# Altium PCB UC3843_SWITCHING_POWER_SUPPLY_V1.PcbDoc
Units mil, origin at the board's own origin, x right, y up, seen from the top; angles counter-clockwise.
Board outline 3300 x 1700 mil, 2 copper layers (Top Layer, Bottom Layer); 34 components, 24 nets, 89 pads, 0 vias.
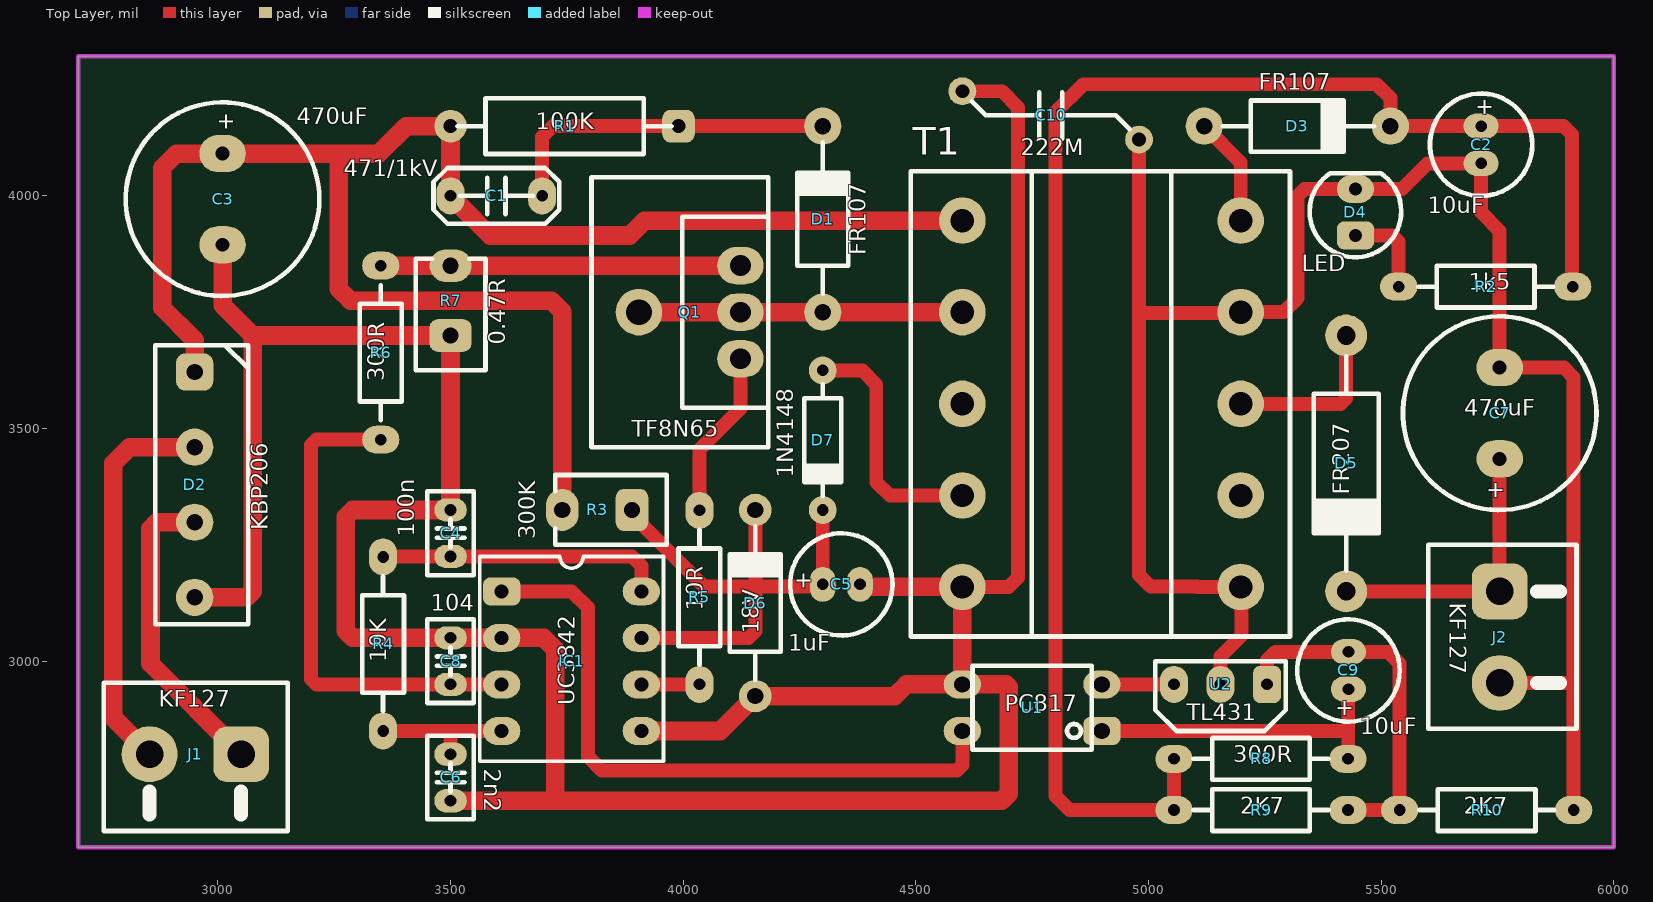
[diagram p0: Top Layer view]
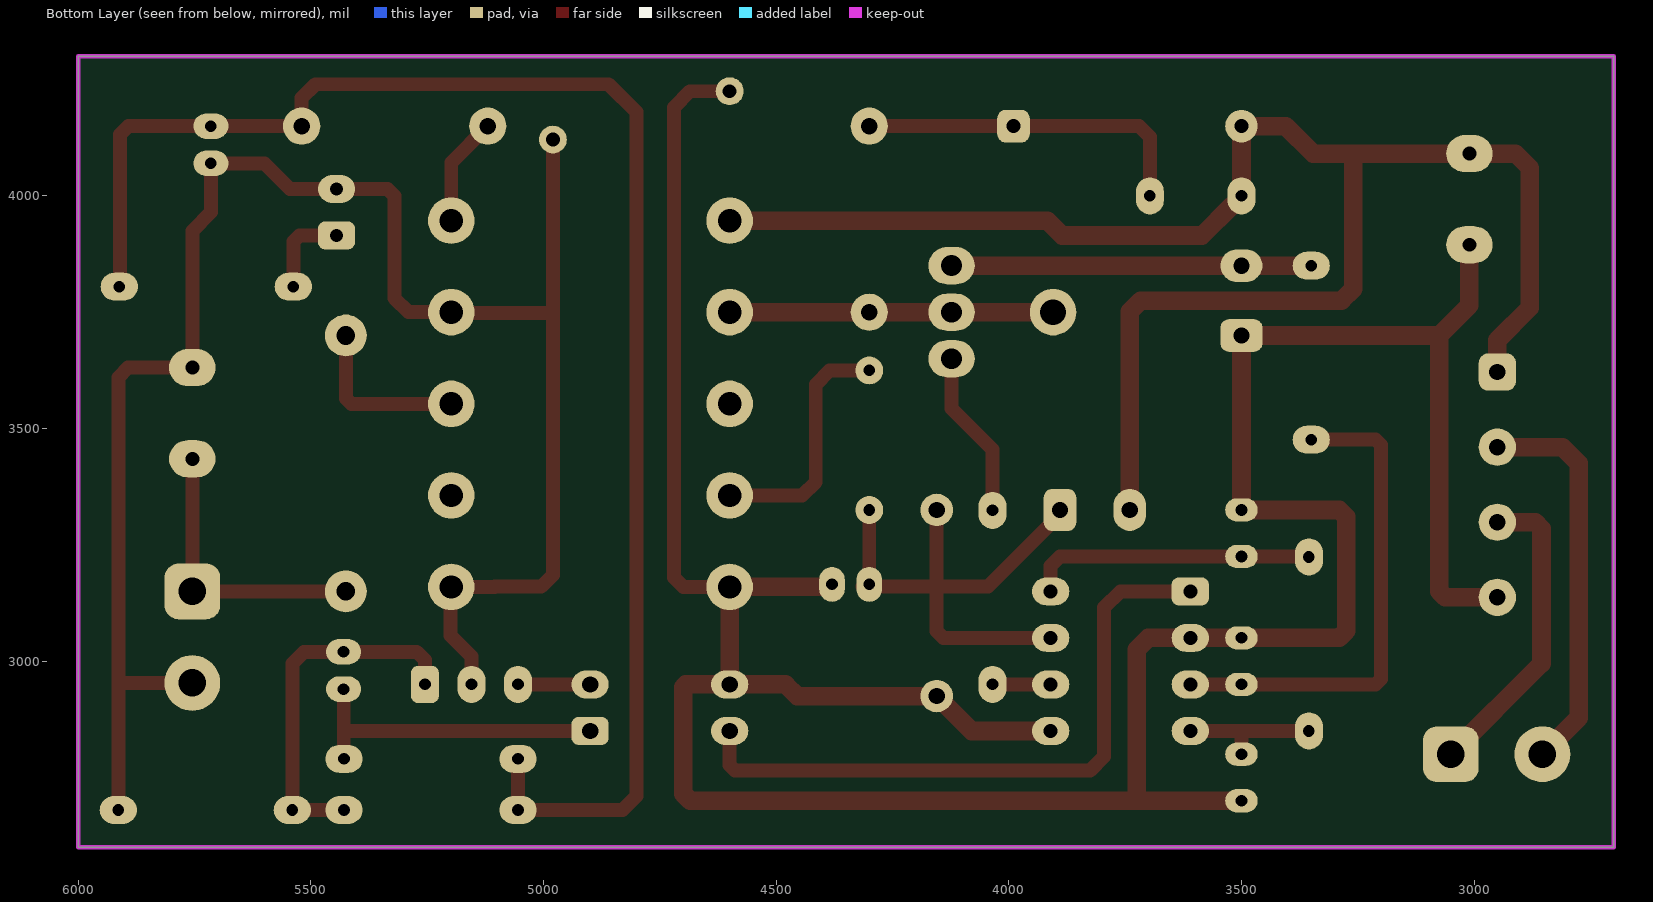
[diagram p1: Bottom Layer view, seen from below]
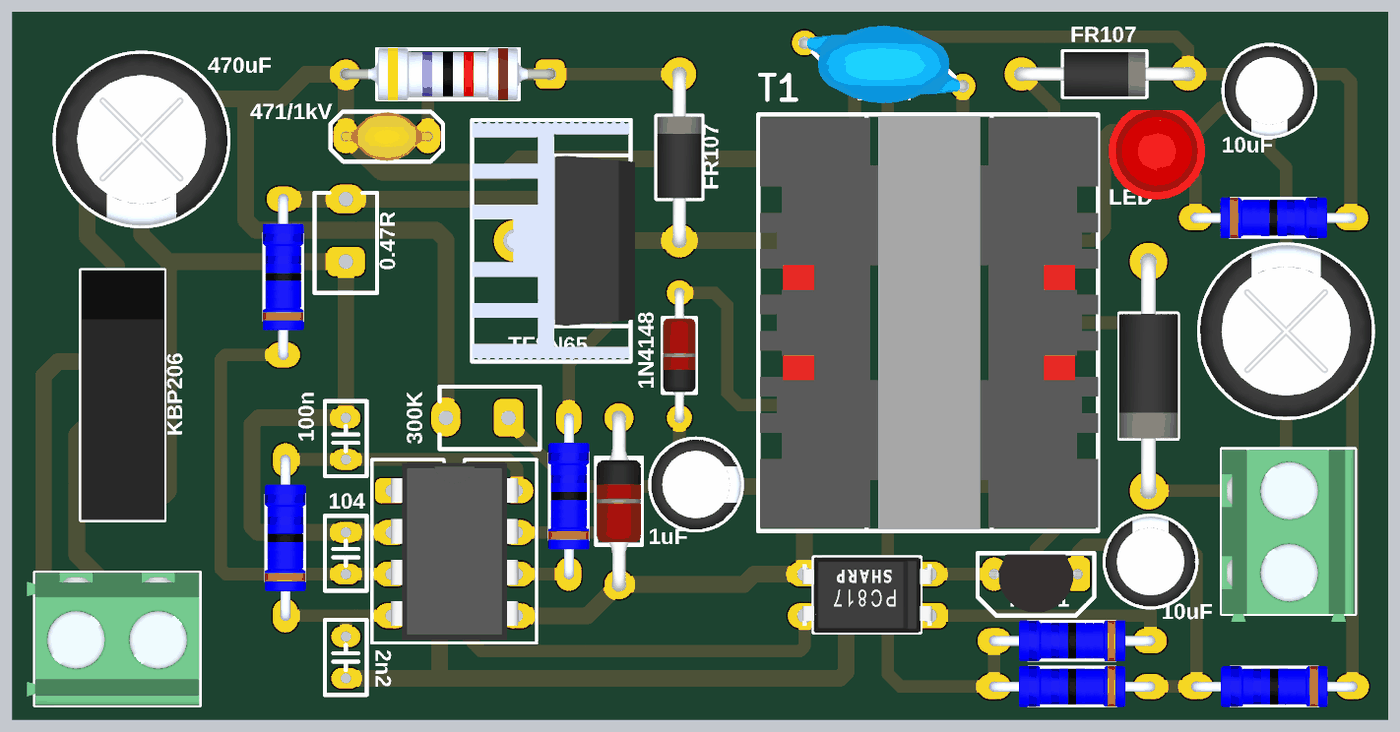
[diagram p2: 3D render of the assembled board from above, using the file's embedded part models]

## Layer stack, top to bottom
Top Solder: solder mask 0.4, Solder Resist, Dk 3.5
Top Layer: signal copper 1.4
Dielectric 1: dielectric 12.6, FR-4, Dk 4.8
Bottom Layer: signal copper 1.4
Bottom Solder: solder mask 0.4, Solder Resist, Dk 3.5

## Board outline
2700,2600 6000,2600 6000,4300 2700,4300

## Design rules (kind name [scope] priority, off if disabled: settings)
Clearance [All] p1: gap=10 ignorepadtopadclearanceinfootprint=FALSE except(0: Arc-Hole Track-Hole SMDPad-Hole THPad-Hole Via-Hole Fill-Hole Poly-Hole Region-Hole Text-Hole)
PolygonConnect [All] p1: connectstyle=Relief reliefconductorwidth=10 reliefentries=4 polygonreliefangle="90 Angle" airgapwidth=10
RoutingVias [All] p1: holewidth=28 width=50 viastyle="Through Hole" minholewidth=28 minwidth=50 maxholewidth=28 maxwidth=50
SolderMaskExpansion [All] p1: expansion=4 istentingtop=FALSE
Width [All] p1: maxlimit=50 minlimit=10 preferedwidth=20
30 further rules are at their usual default settings.

## Components (designator, comment, footprint, x,y, rotation, side; value= is the part's Value field where it differs from the comment)
C1 "471/1kV" CAP_Ceramic_5MM 3598.43,4000 r180 top
C2 "10uF" CAP_RAD_D05x11 5715,4110 r270 top
C3 "470uF" CAP_RAD_D10x12.5 3010,3993 r270 top
C4 "100n" CAP_Ceramic_2.5MM 3500,3275 r90 top
C5 "1uF" CAP_RAD_D05x11 4340,3165 r0 top
C6 "2n2" CAP_Ceramic_2.5MM 3500,2750 r90 top
C7 "470uF" CAP_RAD_D10x12.5 5755,3533 r90 top
C8 "104" CAP_Ceramic_2.5MM 3500,3000 r270 top
C9 "10uF" CAP_RAD_D05x11 5430,2980 r90 top
C10 "222M" CAP_Ceramic_473M_9.65mm 4790,4173 r0 top
D1 "FR107" DO-204AL-BK 4300,3950 r90 top
D2 "KBP206" DIODE-KBP206 2950,3379.29 r270 top
D3 "FR107" DO-204AL-BK 5320,4150 r0 top
D4 "LED" LED_5MM 5445,3965 r90 top
D5 "FR207" DO-204AC-BK 5425,3425 r270 top
D6 "18V" DO-204AL-RD 4155,3125 r90 top
D7 "1N4148" DO-204AH-RD 4300,3475 r270 top
IC1 "UC3842" DIP-8 3757.64,3012.2 r0 top
J1 "KF127" DG127-5.0-02P-14-00AH 3050,2800 r180 top
J2 "KF127" DG127-5.0-02P-14-00AH 5755,3150 r270 top
Q1 "TF8N65" TO-220F-HEAT-SINK 4123,3750 r90 top
R1 "100K" RES-0.5W-H 3745,4150 r180 top
R2 "1k5" RES-0.25W-H#1 5725,3805 r0 top
R3 "300K" RES-1W-V 3890,3325 r180 top
R4 "10K" RES-0.25W-H#1 3355,3037 r90 top
R5 "10R" RES-0.25W-H#1 4035,3137 r90 top
R6 "300R" RES-0.25W-H#2 3350,3663 r90 top
R7 "0.47R" RES-1W-V 3500,3700 r90 top
R8 "300R" RES-0.25W-H#1 5242,2790 r180 top
R9 "2K7" RES-0.25W-H#1 5242,2680 r180 top
R10 "2K7" RES-0.25W-H#1 5727,2680 r180 top
T1 "EE25" TRANSFORMER-EE25-10-6-VERTICAL(5+5) 4899.21,3553.15 r0 top
U1 "PC817" PC817-DIP 4750,2900 r180 top
U2 "TL431" TO-92 5155,2950 r180 top

## Footprints (in the part's own frame and the unit in brackets; to place one, negate y for a bottom-side part, rotate by r counter-clockwise, add the part's x,y. Pads: shape width x height; smd on the part's side, far side on the other; paste and mask are expansions set on the pad)
CAP_Ceramic_2.5MM [mil]
  oval 50x70 hole 25: 1(-50,0) 2(50,0)
  silkscreen extent -90,-50 90,50, body extent -92,-49 92,49, height 289
CAP_Ceramic_5MM [mil]
  oval 60x80 hole 25: 1(-98.43,0) 2(98.43,0)
  silkscreen extent -135,-60 135,60, body extent -110,-59 110,59, height 216
CAP_Ceramic_473M_9.65mm [mil]
  round 60 hole 30: 1(-190,52) 2(190,-52)
  silkscreen extent -170,-50 170,50, body extent -202,-93 202,93, height 354
CAP_RAD_D05x11 [mil]
  oval 55x75 hole 25: 1(-40,0) 2(40,0)
  silkscreen extent -110,-110 110,110, body extent -108,-108 108,108, height 492
CAP_RAD_D10x12.5 [mil]
  oval 80x100 hole 30: 1(-98,0) 2(98,0)
  silkscreen extent -208,-208 208,208, body extent -207,-207 207,207, height 551
DG127-5.0-02P-14-00AH [mil]
  rrect50% 120x120 hole 59.06: 1(0,0)
  round 120 hole 59.06: 2(196.85,0)
  silkscreen extent -100,-154 295,165, body extent -98,-154 315,165, height 398
DIODE-KBP206 [mil]
  rrect50% 80x80 hole 35: 1(-242.13,0)
  round 80 hole 35: 2(-80.71,0) 3(80.71,0) 4(242.13,0)
  silkscreen extent -300,-85 300,115, body extent -300,-85 300,115, height 530
DIP-8 [mil]
  rrect50% 80x60 hole 30: 1(-147.64,137.8)
  oval 80x60 hole 30: 2(-147.64,37.8) 3(-147.64,-62.2) 4(-147.64,-162.2) 5(152.36,-162.2) 6(152.36,-62.2) 7(152.36,37.8) 8(152.36,137.8)
  silkscreen extent -195,-227 200,213, body extent -150,-220 156,205, height 177
DO-204AC-BK [mil]
  round 90 hole 40: 1(-275,0) 2(275,0)
  silkscreen extent -230,-70 230,70, body extent -293,-71 293,71, height 146
DO-204AH-RD [mil]
  round 60 hole 25: 1(-150,0) 2(150,0)
  silkscreen extent -120,-40 120,40, body extent -161,-39 161,39, height 82
DO-204AL-BK [mil]
  round 80 hole 35: 1(-200,0) 2(200,0)
  silkscreen extent -160,-55 165,55, body extent -216,-53 216,53, height 110
DO-204AL-RD [mil]
  round 70 hole 35: 1(-200,0) 2(200,0)
  silkscreen extent -165,-55 165,55, body extent -216,-53 216,53, height 110
LED_5MM [mil]
  rrect50% 60x80 hole 27.56: 1(-50,0)
  oval 60x80 hole 27.56: 2(50,0)
  silkscreen extent -97,-98 84,98, body extent -116,-116 98,116, height 339
PC817-DIP [mil]
  rrect50% 80x60 hole 35: 1(-150,50)
  oval 80x60 hole 35: 2(-150,-50) 3(150,-50) 4(150,50)
  silkscreen extent -128,-90 128,90, body extent -155,-90 155,90, height 169
RES-0.5W-H [mil]
  rrect50% 70x70 hole 30: 1(-245,0)
  round 70 hole 30: 2(245,0)
  silkscreen extent -230,-60 230,60, body extent -258,-63 258,63, height 143
RES-0.25W-H#1 [mil]
  oval 80x60 hole 25: 1(-187,0) 2(187,0)
  silkscreen extent -145,-45 145,45, body extent -199,-49 199,49, height 109
RES-0.25W-H#2 [mil]
  oval 60x80 hole 25: 1(-187,0) 2(187,0)
  silkscreen extent -145,-45 145,45, body extent -199,-49 199,49, height 109
RES-1W-V [mil]
  rrect50% 70x90 hole 35: 1(0,0)
  oval 70x90 hole 35: 2(150,0)
  silkscreen extent -75,-75 165,75, body extent -79,-79 163,79, height 554
TO-92 [mil]
  rrect50% 60x80 hole 25: 1(-100,0)
  oval 60x80 hole 25: 2(0,0) 3(100,0)
  silkscreen extent -140,-50 140,100, body extent -109,-48 109,93, height 298
TO-220F-HEAT-SINK [mil]
  oval 80x100 hole 45: 1(-100,0) 2(0,0) 3(100,0)
  round 100 hole 55: 2(0,218)
  silkscreen extent -290,-60 290,320, body extent -287,-71 287,320, height 790
TRANSFORMER-EE25-10-6-VERTICAL(5+5) [mm]
  round 2.54 hole 1.27: 1(-7.6,10) 2(-7.6,5) 3(-7.6,0) 4(-7.6,-5) 5(-7.6,-10) 6(7.6,-10) 7(7.6,-5) 8(7.6,0) 9(7.6,5) 10(7.6,10)
  silkscreen extent -10.41,-12.7 10.29,12.7, body extent -10.3,-12.6 10.3,12.6, height 22.1

## Part data
C1 C4 C6 C8 C10: library part Capacitors(Disc)
C2 C3 C5 C7 C9: library part Capacitor(Radian)
D1 D3: library part Diode-FR107, "1A 1000V"
D2: library part Diode-KBP206
D4: library part "LED 5MM"
D5: library part Diode-FR207
D6: library part Diode-Zener
D7: library part Diode-1N4148, "The fast switching diode"
IC1: library part SMPS-UC3842, "Operating Frequency up to 500KHz"
J1 J2: library part DG127-5.0-02P-14-00AH
Q1: library part Mostfet-TF8N65, "VDS = 650V /  ID (at VGS=10V) 8A /  RDS(ON) (at VGS=10V) < 1.15Ω"
R1 R2 R3 R4 R5 R6 R7 R8 R9 R10: library part "Resistors THD"
T1: library part TRANS-EE25-10-6-VERTICAL(5+5)
U1: library part Opto-PC817
U2: library part Ic-TL431

## Nets (pads, with @x,y where several pads share a name; then routed paths per layer and width w, separated by ;. In a path a pad name is that pad's centre, name@x,y a point inside that pad or via, vN(x,y) a via of type N, cw(c..) or ccw(c..) an arc to the next point about the centre after c; other vN are vias at no path point)
GND: C3.2 C4.2 C5.2 C6.1 C8.1 C10.1 D2.4 D6.1 IC1.2 IC1.5 R7.1 T1.5 U1.3 | length 6946.5
  Top Layer w30: T1.5 4699.45,3159.45 4720,3180 4720,4190 4685,4225 C10.1
  Top Layer w40: D2.4 3062.17,3137.17 3075,3150 3075,3700 ; C3.2 3010,3765 3075,3700 ; C6.1 3725,2700 ; IC1.5 4080,2850 D6.1 4455,2925 4480,2950 U1.3 ; C5.2@4375.28,3159.72 4599.72,3159.72 T1.5 U1.3 ; 3075,3700 R7.1 C4.2 3290,3325 3275,3310 3275,3065 3290,3050 C8.1 IC1.2 3700,3050 3725,3025 3725,2700 ; 3725,2700 4685,2700 4700,2715 4700,2944.14 4694.14,2950 U1.3
NetC1_1: C1.1 D1.2 R1.1 | length 739.6
  Top Layer w30: C1.1 3696.85,4126.85 3720,4150 R1.1 D1.2
NetC1_2: C1.2 C3.1 D2.1 R1.2 R3.2 T1.1 | length 3612.6
  Top Layer w40: D2.1 2950,3690 2880,3760 2880,4060 2911,4091 C3.1 3260,4091 ; C1.2 3500,4085 R1.2 3405,4150 3346,4091 3260,4091 ; C1.2@3520,3980 3585,3915 3885,3915 3916.85,3946.85 T1.1 ; R3.2 3740,3751.57 3716.57,3775 3285,3775 3260,3800 3260,4091
NetC2_1: C2.1 D3.2 R2.2 R8.2 R9.2 | length 3390.2
  Top Layer w30: R8.2 R9.2 4830,2680 4800,2710 4800,4180 4860,4240 5490,4240 5519.9,4210.1 5519.9,4150.1 D3.2 5892.43,4150 5910,4132.43 5910,3818.86 5912,3816.86 R2.2
NetC2_2: C2.2 C7.2 C10.2 D4.2 J2.2 R10.1 T1.6 T1.9 U2.2 | length 4106.1
  Top Layer w30: C10.2 4980,3748.43 ; U2.2 5155,3010 5200,3055 5200,3157.87 T1.6 5105,3159.45 5104.45,3160 5005,3160 4980,3185 4980,3748.43 ; J2.2 5906.85,2953.15 5914,2946 ; R10.1 5914,2946 ; 4980,3748.43 5196.85,3748.43 T1.9 5290,3750 5320,3780 5320,4000 5335,4015 D4.2 5545,4015 5600,4070 C2.2 5715,3965 5755,3925 C7.2 5893,3631 5914,3610 5914,2946
NetC4_1: C4.1 IC1.8 R4.2 | length 618.3
  Top Layer w20: 3907.57,3207.43 3910,3205
  Top Layer w30: R4.2@3365,3221 R4.2@3375,3221 ; R4.2@3365,3225 C4.1 3890,3225 3907.57,3207.43 ; IC1.8 3910,3205
NetC5_1: C5.1 D6.2 D7.2 IC1.7 R3.1 | length 1165.4
  Top Layer w30: R3.1 3890,3315 4045,3160 4150,3160 ; IC1.7 4140,3050 4155,3065 4155,3160 ; D6.2 4155,3160 ; C5.1 D7.2 ; C5.1@4315,3160 4155,3160
NetC6_2: C6.2 IC1.4 R4.1 | length 305
  Top Layer w30: R4.1 3500,2850 ; C6.2 3500,2850 ; IC1.4 3500,2850
NetC7_1: C7.1 D5.2 J2.1 | length 615
  Top Layer w30: D5.2 J2.1 C7.1
NetC8_2: C8.2 IC1.3 R6.1 | length 1072.3
  Top Layer w30: R6.1 3211.72,3476 3200,3464.28 3200,2961.72 3211.72,2950 C8.2 IC1.3
NetC9_1: C9.1 R8.1 U1.1 | length 679.9
  Top Layer w30: U1.1 5429.5,2850 ; R8.1 5429.5,2790.5 5429.5,2850 ; C9.1 5429.5,2939.5 5429.5,2850
NetC9_2: C9.2 R9.1 R10.2 U2.1 | length 798.6
  Top Layer w30: U2.1@5267.43,2962.43 U2.1 5255,3002.43 5272.57,3020 C9.2 5515,3020 5540,2995 R10.2 R9.1
NetD1_1: D1.1 Q1.2 T1.2 | length 695
  Top Layer w40: Q1.2@3905,3750 4123,3750 D1.1 T1.2
NetD2_2: D2.2 J1.2 | length 846.9
  Top Layer w40: J1.2 2775,2878.15 2775,3425 2810,3460 D2.2
NetD2_3: D2.3 J1.1 | length 666.4
  Top Layer w40: D2.3 2868.58,3298.58 2855,3285 2855,2995 J1.1
NetD3_1: D3.1 T1.10 | length 235.6
  Top Layer w30: D3.1 5198.43,4071.57 T1.10
NetD4_1: D4.1 R2.1 | length 195.4
  Top Layer w30: D4.1 5525,3915 5538,3902 R2.1
NetD5_1: D5.1 T1.8 | length 366.5
  Top Layer w30: T1.8 5413.15,3553.15 5425,3565 D5.1
NetD7_1: D7.1 T1.4 | length 534.9
  Top Layer w30: D7.1 4385,3625 4415,3595 4415,3385 4444.35,3355.65 4599.35,3355.65 T1.4
NetIC1_1: IC1.1 U1.4 | length 1415.1
  Top Layer w30: IC1.1 3760,3150 3795,3115 3795,2795 3825,2765 4588.28,2765 4600,2776.72 U1.4
NetIC1_6: IC1.6 R5.1 | length 125
  Top Layer w30: IC1.6 R5.1
NetQ1_1: Q1.1 R5.2 | length 362.5
  Top Layer w30: R5.2 4035,3455 4123,3543 Q1.1
NetQ1_3: Q1.3 R6.2 R7.2 | length 773
  Top Layer w40: R6.2 R7.2 Q1.3
NetU1_2: U1.2 U2.3 | length 155
  Top Layer w30: U1.2 U2.3
pads on no net: T1.3 T1.7

## Keep-outs
Keep-Out Layer:
  the board outline again, w10

## Dimensions
6000,4300 to 6000,2600 on Mechanical 1
6000,4300 to 2700,4300 on Mechanical 1

## Text inside footprints (layer, text, board x,y; h text height)
C2: Top Overlay "+" at 5696.07,4211.43 h60 r270
C3: Top Overlay "+" at 2991.07,4179.43 h60 r270
C5: Top Overlay "+" at 4238.57,3146.07 h60
C7: Top Overlay "+" at 5773.93,3346.57 h60 r90
C9: Top Overlay "+" at 5448.93,2878.57 h60 r90